# Altium PCB sensorPlate.PcbDoc
Units mm, origin at the board's own origin, x right, y up, seen from the top; angles counter-clockwise.
Board outline 58.2 x 16 mm, 2 copper layers (Top Layer, Bottom Layer), stack 1.569 mm thick; 8 components, 16 nets, 40 pads, 0 vias.
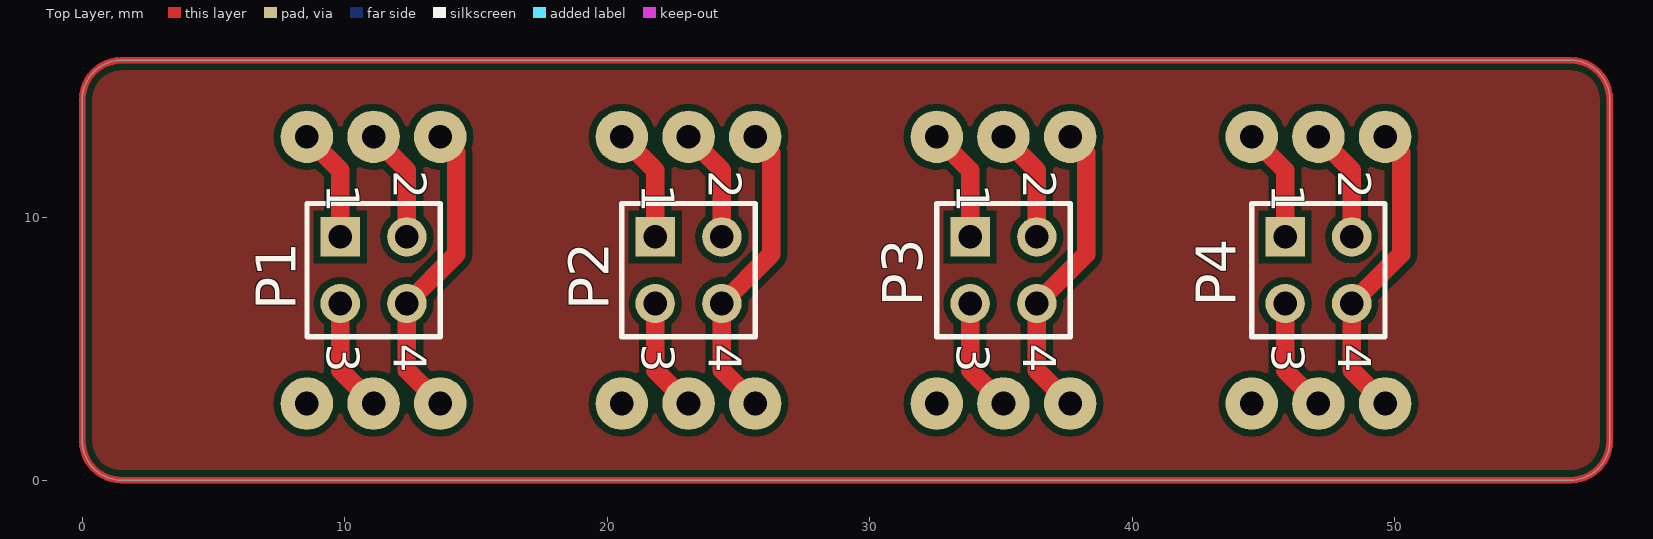
[diagram p0: Top Layer view]
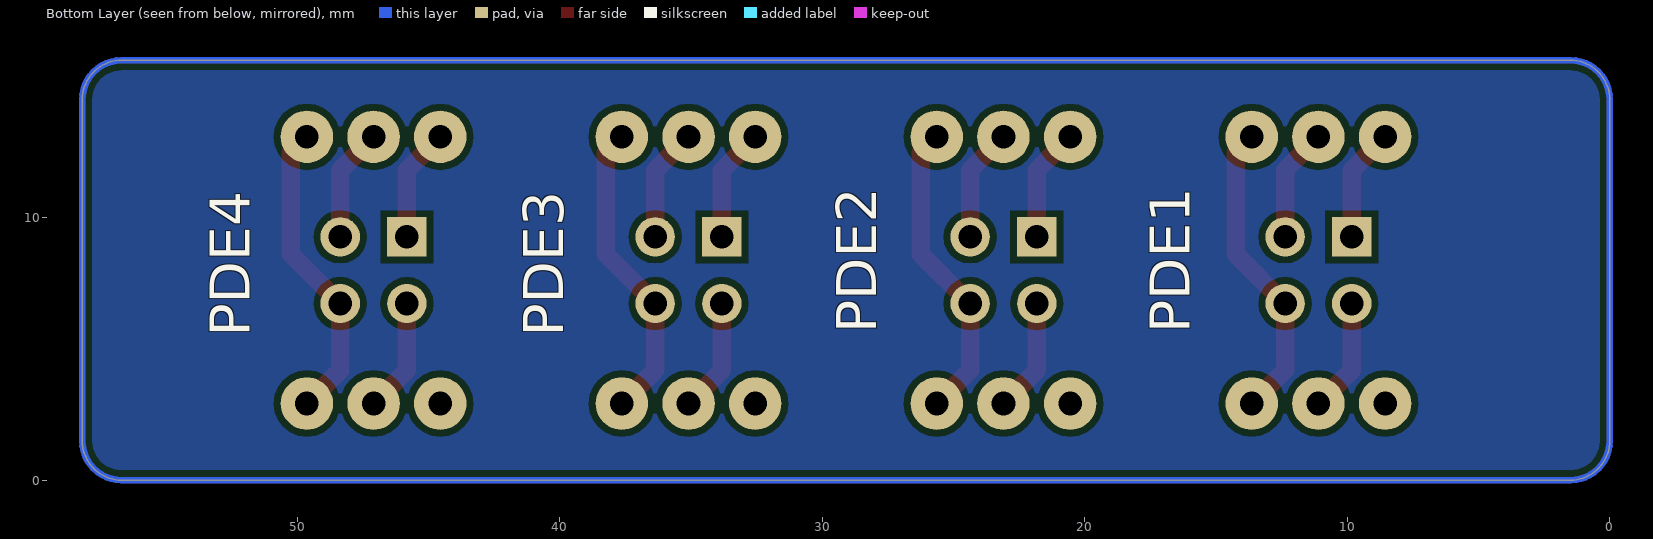
[diagram p1: Bottom Layer view, seen from below]

## Layer stack, top to bottom
Top Solder: solder mask 0.0254, SM-001, Dk 4
Top Layer: signal copper 0.035
Dielectric 1: core 1.4986, Core-043, Dk 4.3
Bottom Layer: signal copper 0.035
Bottom Solder: solder mask 0.0254, SM-001, Dk 4

## Board outline
0,1.5 0,14.5 cw(c1.5,14.5) 1.5,16 56.7,16 cw(c56.7,14.5) 58.2,14.5 58.2,1.5 cw(c56.7,1.5) 56.7,0 1.5,0 cw(c1.5,1.5)

## Design rules (kind name [scope] priority, off if disabled: settings)
Clearance [All] p1: gap=0.254 ignorepadtopadclearanceinfootprint=FALSE except(0: Arc-Hole Track-Hole SMDPad-Hole THPad-Hole Via-Hole Fill-Hole Poly-Hole Region-Hole Text-Hole)
PolygonConnect [All] p1: connectstyle=Relief reliefconductorwidth=0.254 reliefentries=4 polygonreliefangle="90 Angle" airgapwidth=0.254
RoomDefinition sensorPlate [InComponentClass('sensorPlate')] p1: confinementstyle=ConfineIn formatcopy=TRUE lockcomponents=FALSE outline 0,0 58.2,0 58.2,16.002 0,16.002
RoutingVias [All] p1: holewidth=0.711 width=1.27 viastyle="Through Hole" minholewidth=0.711 minwidth=1.27 maxholewidth=0.711 maxwidth=1.27
SolderMaskExpansion [All] p1: expansion=0.102 istentingtop=FALSE
Width [All] p1: maxlimit=1 minlimit=0.1 preferedwidth=0.254
30 further rules are at their usual default settings.

## Components (designator, comment, footprint, x,y, rotation, side; value= is the part's Value field where it differs from the comment)
P1 "Header 2X2" HDR2X2 9.83,9.271 r270 top locked
P2 "Header 2X2" HDR2X2 21.83,9.271 r270 top locked
P3 "Header 2X2" HDR2X2 33.83,9.271 r270 top locked
P4 "Header 2X2" HDR2X2 45.83,9.271 r270 top locked
PDE1 "XGZP" XGZP_Footprint 6.9,3.801 r90 bottom
PDE2 "XGZP" XGZP_Footprint 18.9,3.801 r90 bottom locked
PDE3 "XGZP" XGZP_Footprint 30.9,3.801 r90 bottom locked
PDE4 "XGZP" XGZP_Footprint 42.9,3.801 r90 bottom locked

## Footprints (in the part's own frame and the unit in brackets; to place one, negate y for a bottom-side part, rotate by r counter-clockwise, add the part's x,y. Pads: shape width x height; smd on the part's side, far side on the other; paste and mask are expansions set on the pad)
HDR2X2 [mm] "Connector; Header; 2x2 Position"
  rect 1.5x1.5 hole 0.9: 1(0,0)
  round 1.5 hole 0.9: 2(0,2.54) 3(2.54,0) 4(2.54,2.54)
  silkscreen extent -1.27,-1.27 3.81,3.81
XGZP_Footprint [mm]
  round 2 hole 0.9: 1(9.28,6.74) 2(9.28,4.2) 3(9.28,1.66) 4(-0.88,1.66) 5(-0.88,4.2) 6(-0.88,6.74)
  body extent 0,0 8.4,8.4, height 9.1

## Part data
P1 P2 P3 P4: "Header, 2-Pin, Dual row", LatestRevisionDate=17-Jul-2002, LatestRevisionNote="Re-released for DXP Platform.", Publisher="Altium Limited"

## Nets (pads, with @x,y where several pads share a name; then routed paths per layer and width w, separated by ;. In a path a pad name is that pad's centre, name@x,y a point inside that pad or via, vN(x,y) a via of type N, cw(c..) or ccw(c..) an arc to the next point about the centre after c; other vN are vias at no path point)
NetP1_1: P1.1 PDE1.3 | length 4.3
  Top Layer w0.7: PDE1.3 9.83,11.811 P1.1
NetP1_2: P1.2 PDE1.2 | length 4.3
  Top Layer w0.7: PDE1.2 12.37,11.811 P1.2
NetP1_3: P1.3 PDE1.5 | length 4.3
  Top Layer w0.7: P1.3 9.83,4.191 PDE1.5
NetP1_4: P1.4 PDE1.1 PDE1.6 | length 11.7
  Top Layer w0.7: PDE1.6 12.37,4.191 P1.4 14.249,8.611 14.249,12.471 PDE1.1
NetP2_1: P2.1 PDE2.3 | length 4.3
  Top Layer w0.7: PDE2.3 21.83,11.811 P2.1
NetP2_2: P2.2 PDE2.2 | length 4.3
  Top Layer w0.7: PDE2.2 24.37,11.811 P2.2
NetP2_3: P2.3 PDE2.5 | length 4.3
  Top Layer w0.7: P2.3 21.83,4.191 PDE2.5
NetP2_4: P2.4 PDE2.1 PDE2.6 | length 11.7
  Top Layer w0.7: PDE2.6 24.37,4.191 P2.4 26.249,8.611 26.249,12.471 PDE2.1
NetP3_1: P3.1 PDE3.3 | length 4.3
  Top Layer w0.7: PDE3.3 33.83,11.811 P3.1
NetP3_2: P3.2 PDE3.2 | length 4.3
  Top Layer w0.7: PDE3.2 36.37,11.811 P3.2
NetP3_3: P3.3 PDE3.5 | length 4.3
  Top Layer w0.7: P3.3 33.83,4.191 PDE3.5
NetP3_4: P3.4 PDE3.1 PDE3.6 | length 11.7
  Top Layer w0.7: PDE3.6 36.37,4.191 P3.4 38.249,8.611 38.249,12.471 PDE3.1
NetP4_1: P4.1 PDE4.3 | length 4.3
  Top Layer w0.7: PDE4.3 45.83,11.811 P4.1
NetP4_2: P4.2 PDE4.2 | length 4.7
  Top Layer w0.254: P4.2@48.132,9.033 P4.2
  Top Layer w0.7: PDE4.2 48.37,11.811 P4.2
NetP4_3: P4.3 PDE4.5 | length 4.3
  Top Layer w0.7: P4.3 45.83,4.191 PDE4.5
NetP4_4: P4.4 PDE4.1 PDE4.6 | length 11.7
  Top Layer w0.7: PDE4.6 48.37,4.191 P4.4 50.249,8.611 50.249,12.471 PDE4.1
pads on no net: PDE1.4 PDE2.4 PDE3.4 PDE4.4
copper on no net: | length 291.6
  Top Layer w0.254: 0,1.5 ccw(c1.5,1.5) 1.5,0 56.7,0 ccw(c56.7,1.5) 58.2,1.5 58.2,14.5 ccw(c56.7,14.5) 56.7,16 1.5,16 ccw(c1.5,14.5) 0,14.5 0,1.5
  Bottom Layer w0.254: 0,1.5 ccw(c1.5,1.5) 1.5,0 56.7,0 ccw(c56.7,1.5) 58.2,1.5 58.2,14.5 ccw(c56.7,14.5) 56.7,16 1.5,16 ccw(c1.5,14.5) 0,14.5 0,1.5

## Polygon pours and split planes (outlines as drawn)
no net on Top Layer "NONET_L01_P006" (solid, pour order 6): 0,16.129 0,0 58.166,0 58.293,0.127 58.293,16.129
no net on Top Layer "NONET_L01_P002" (solid, pour order 2): 45.847,0
no net on Bottom Layer "NONET_L02_P008" (solid, pour order 8): 0,16.002 0,0 58.166,0 58.293,0.127 58.293,16.002

## Text inside footprints (layer, text, board x,y; h text height)
P1: Top Overlay "1" at 9.322,11.303 h1.27 r270; Top Overlay "2" at 11.862,11.811 h1.27 r270; Top Overlay "4" at 11.862,5.207 h1.27 r270; Top Overlay "3" at 9.322,5.207 h1.27 r270
P2: Top Overlay "1" at 21.322,11.303 h1.27 r270; Top Overlay "2" at 23.862,11.811 h1.27 r270; Top Overlay "4" at 23.862,5.207 h1.27 r270; Top Overlay "3" at 21.322,5.207 h1.27 r270
P3: Top Overlay "1" at 33.322,11.303 h1.27 r270; Top Overlay "2" at 35.862,11.811 h1.27 r270; Top Overlay "4" at 35.862,5.207 h1.27 r270; Top Overlay "3" at 33.322,5.207 h1.27 r270
P4: Top Overlay "3" at 45.322,5.207 h1.27 r270; Top Overlay "4" at 47.862,5.207 h1.27 r270; Top Overlay "2" at 47.862,11.811 h1.27 r270; Top Overlay "1" at 45.322,11.303 h1.27 r270